# EAGLE board Qwiic-IMU-Panel (EAGLE 7.7.0), part 1 of 2
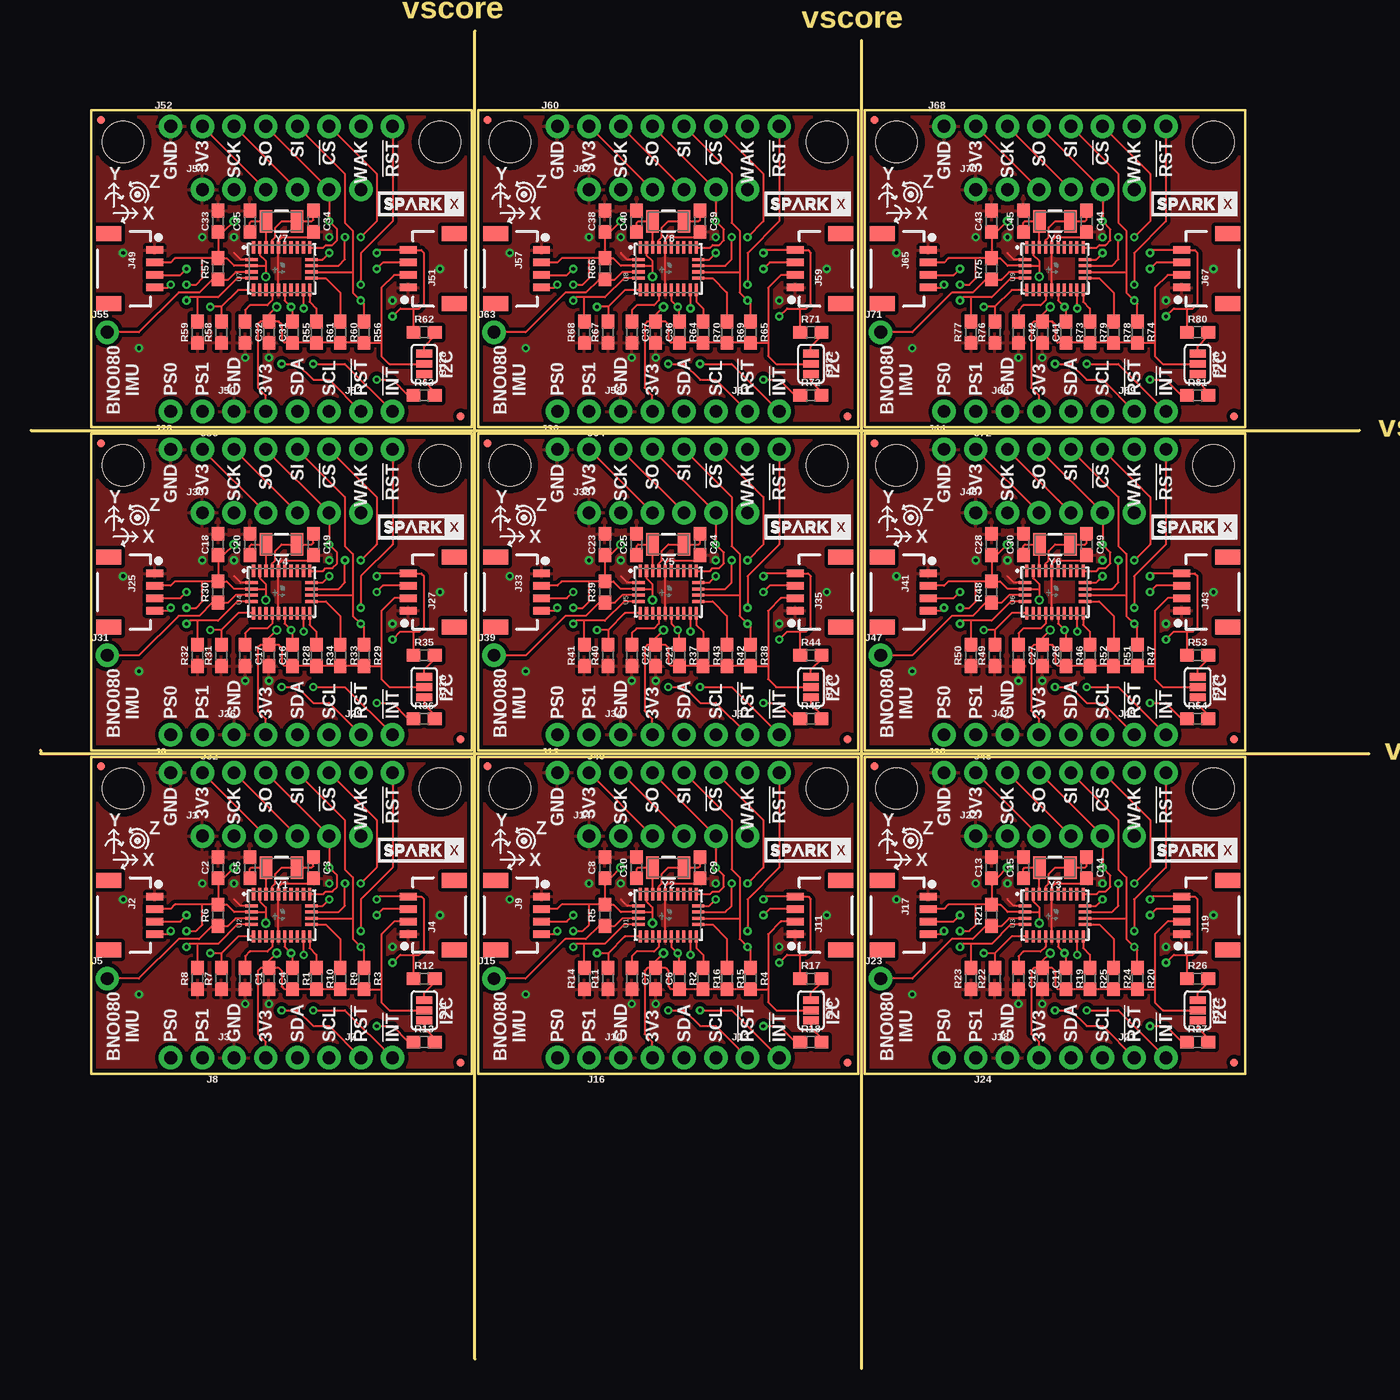
[diagram p0: board, top side]
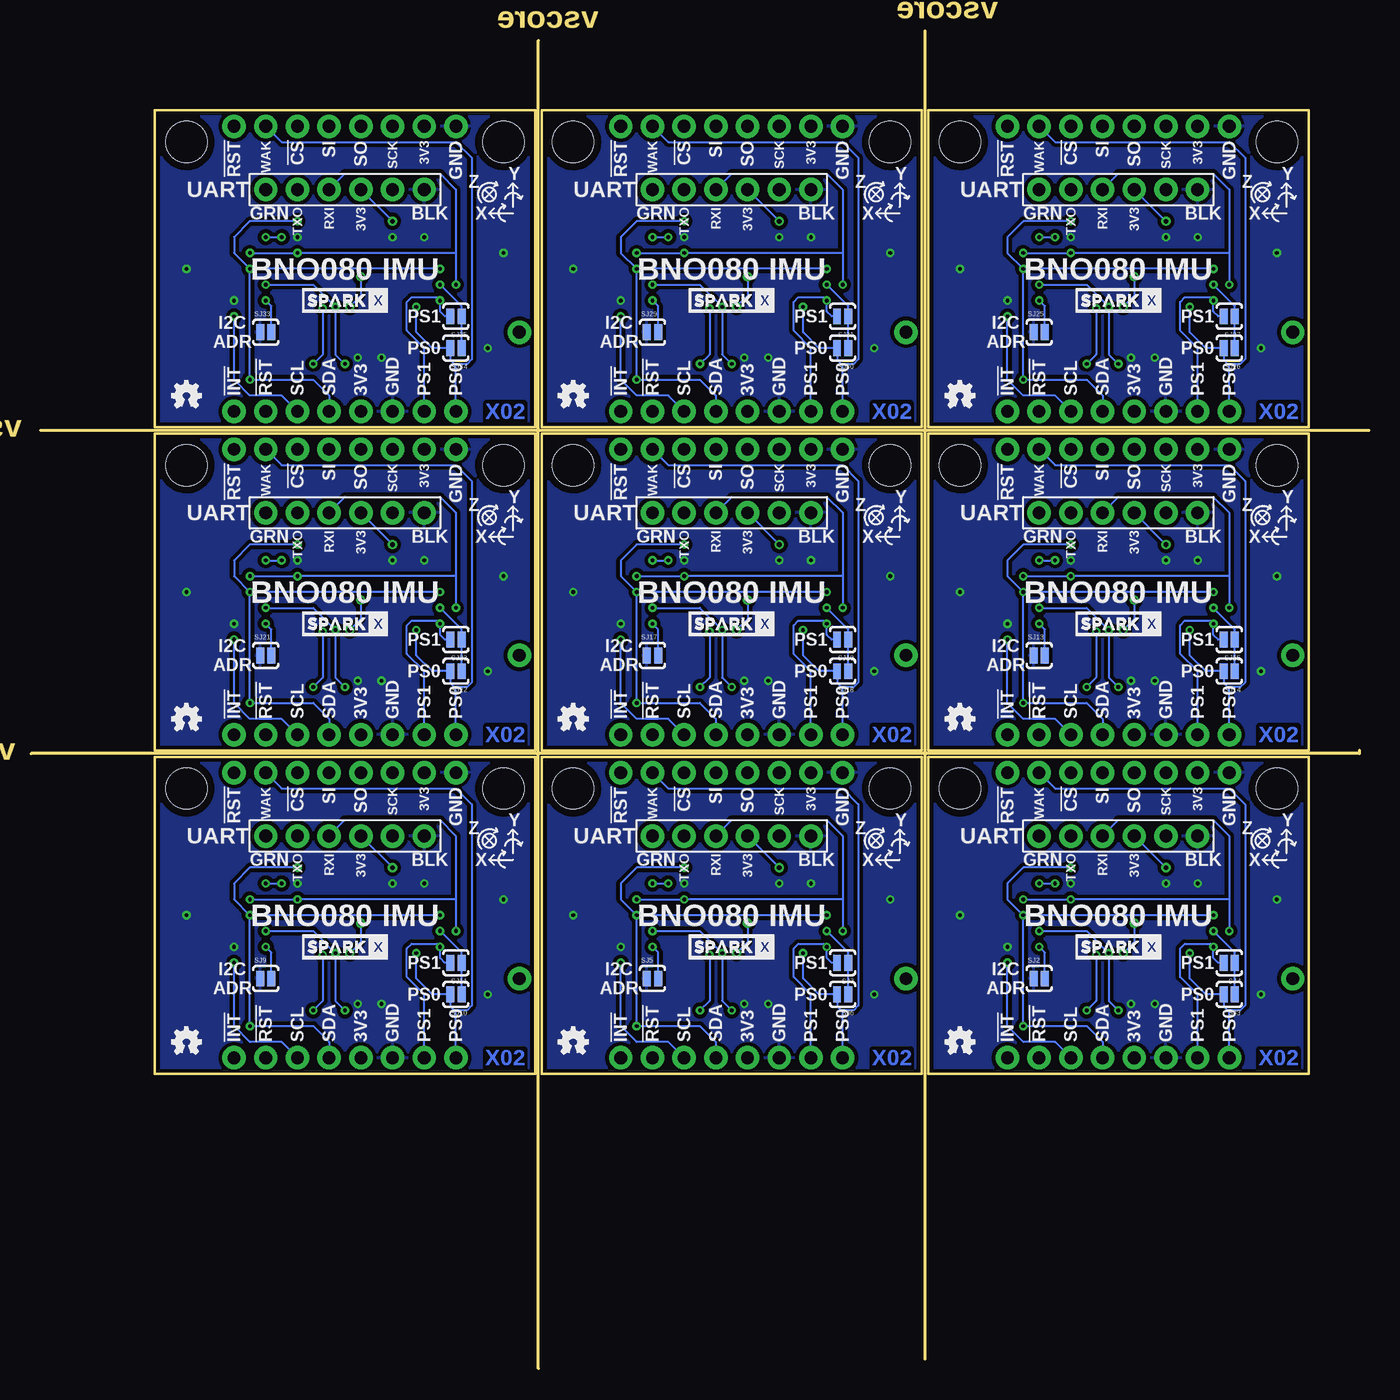
[diagram p1: board, bottom side, seen from below]

Size 107.19 x 107.19 mm. Coordinates in mm from the lower left corner, seen from the top.
Outline: 0.76,49.53 0.76,49.28 107.19,49.28
Outline: 0,75.18 106.43,75.18
Outline: 66.55,0 66.55,106.43
Outline: 35.56,0.76 35.56,107.19
Outline: 4.83,23.62 4.83,49.02 35.31,49.02 35.31,23.62 4.83,23.62
Outline: 35.81,23.62 35.81,49.02 66.29,49.02 66.29,23.62 35.81,23.62
Outline: 66.8,23.62 66.8,49.02 97.28,49.02 97.28,23.62 66.8,23.62
Outline: 4.83,49.53 4.83,74.93 35.31,74.93 35.31,49.53 4.83,49.53
Outline: 35.81,49.53 35.81,74.93 66.29,74.93 66.29,49.53 35.81,49.53
Outline: 66.8,49.53 66.8,74.93 97.28,74.93 97.28,49.53 66.8,49.53
Outline: 4.83,75.44 4.83,100.84 35.31,100.84 35.31,75.44 4.83,75.44
Outline: 35.81,75.44 35.81,100.84 66.29,100.84 66.29,75.44 35.81,75.44
Outline: 66.8,75.44 66.8,100.84 97.28,100.84 97.28,75.44 66.8,75.44
Copper layers (1*16): Top 0.035mm / dielectric 1.5mm / Bottom 0.035mm
Design rules "SparkFun-2-layer-PCBWay-LIMIT": minimum track width 6mil, minimum drill 12mil, track to track 6mil, track to pad 6mil, pad to pad 6mil, via to via 6mil, smd to smd 6mil, copper to edge 6mil, drill to drill 6mil, minimum pad ring 7mil, minimum via ring 7mil, stop-mask expansion 4mil, vias tented up to drill 25mil, thermal gap 10mil

## Footprints (pad centres in the part's own frame; a part is rotated, then mirrored left to right if it is on the bottom)
0603 = smd 1.1 x 1: 1 -0.85,0; 2 0.85,0
1X06_NO_SILK = drill 1.016 pad 1.88: 1 0,0; 2 2.54,0; 3 5.08,0; 4 7.62,0; 5 10.16,0; 6 12.7,0
1X04_1MM_RA = smd 0.6 x 1.35: 1 -1.5,0; 2 -0.5,0; 3 0.5,0; 4 1.5,0 | smd 1.2 x 2: NC1 2.8,-3.675; NC2 -2.8,-3.675
1X04_NO_SILK = drill 1.016 pad 1.88: 1 0,0; 2 2.54,0; 3 5.08,0; 4 7.62,0
1X01_NO_SILK = drill 1.016 pad 1.88: 1 0,0
1X08_NO_SILK = drill 1.016 pad 1.88: 1 0,0; 2 2.54,0; 3 5.08,0; 4 7.62,0; 5 10.16,0; 6 12.7,0; 7 15.24,0; 8 17.78,0
1X02_NO_SILK = drill 1.016 pad 1.88: 1 0,0; 2 2.54,0
STAND-OFF = hole 3.302: 0,0
MICRO-FIDUCIAL = smd 0.635 x 0.635: 1 0,0
SMT-JUMPER_3_2-NC_PASTE_SILK = smd 0.635 x 1.27: 1 -0.813,0; 2 0,0; 3 0.813,0
SJ_2S-NO = smd 0.635 x 1.27: 1 -0.45,0; 2 0.45,0
LGA-28 = smd 1 x 0.25: 1 1.7,2.25; 6 -1.7,2.25; 7 -1.7,1.75; 8 -1.7,1.25; 9 -1.7,0.75; 10 -1.7,0.25; 11 -1.7,-0.25; 12 -1.7,-0.75; 13 -1.7,-1.25; 14 -1.7,-1.75; 15 -1.7,-2.25; 20 1.7,-2.25; 21 1.7,-1.75; 22 1.7,-1.25; 23 1.7,-0.75; 24 1.7,-0.25; 25 1.7,0.25; 26 1.7,0.75; 27 1.7,1.25; 28 1.7,1.75 | smd 0.25 x 1: 2 0.75,2.4; 3 0.25,2.4; 4 -0.25,2.4; 5 -0.75,2.4; 16 -0.75,-2.4; 17 -0.25,-2.4; 18 0.25,-2.4; 19 0.75,-2.4
CRYSTAL-SMD-3.2X1.5MM = smd 1 x 1.8: P$1 -1.25,0; P$2 1.25,0

## Placement (x,y rotation side)
C1  0.1uF  [0603]  17.14,31.24 270 top
C2  0.1uF  [0603]  14.99,40.13 90 top
C3  22pF  [0603]  22.61,40.13 270 top
C4  0.1uF  [0603]  19.05,31.24 270 top
C5  22pF  [0603]  17.53,40.13 90 top
C6  0.1uF  [0603]  50.04,31.24 270 top
C7  0.1uF  [0603]  48.13,31.24 270 top
C8  0.1uF  [0603]  45.97,40.13 90 top
C9  22pF  [0603]  53.59,40.13 270 top
C10  22pF  [0603]  48.51,40.13 90 top
C11  0.1uF  [0603]  81.03,31.24 270 top
C12  0.1uF  [0603]  79.12,31.24 270 top
C13  0.1uF  [0603]  76.96,40.13 90 top
C14  22pF  [0603]  84.58,40.13 270 top
C15  22pF  [0603]  79.5,40.13 90 top
C16  0.1uF  [0603]  19.05,57.15 270 top
C17  0.1uF  [0603]  17.14,57.15 270 top
C18  0.1uF  [0603]  14.99,66.04 90 top
C19  22pF  [0603]  22.61,66.04 270 top
C20  22pF  [0603]  17.53,66.04 90 top
C21  0.1uF  [0603]  50.04,57.15 270 top
C22  0.1uF  [0603]  48.13,57.15 270 top
C23  0.1uF  [0603]  45.97,66.04 90 top
C24  22pF  [0603]  53.59,66.04 270 top
C25  22pF  [0603]  48.51,66.04 90 top
C26  0.1uF  [0603]  81.03,57.15 270 top
C27  0.1uF  [0603]  79.12,57.15 270 top
C28  0.1uF  [0603]  76.96,66.04 90 top
C29  22pF  [0603]  84.58,66.04 270 top
C30  22pF  [0603]  79.5,66.04 90 top
C31  0.1uF  [0603]  19.05,83.06 270 top
C32  0.1uF  [0603]  17.14,83.06 270 top
C33  0.1uF  [0603]  14.99,91.95 90 top
C34  22pF  [0603]  22.61,91.95 270 top
C35  22pF  [0603]  17.53,91.95 90 top
C36  0.1uF  [0603]  50.04,83.06 270 top
C37  0.1uF  [0603]  48.13,83.06 270 top
C38  0.1uF  [0603]  45.97,91.95 90 top
C39  22pF  [0603]  53.59,91.95 270 top
C40  22pF  [0603]  48.51,91.95 90 top
C41  0.1uF  [0603]  81.03,83.06 270 top
C42  0.1uF  [0603]  79.12,83.06 270 top
C43  0.1uF  [0603]  76.96,91.95 90 top
C44  22pF  [0603]  84.58,91.95 270 top
C45  22pF  [0603]  79.5,91.95 90 top
J1  [1X06_NO_SILK]  13.72,42.67 0 top
J2  SMD  [1X04_1MM_RA]  9.91,36.32 270 top
J3  PTH  [1X04_NO_SILK]  16.26,24.89 0 top
J4  SMD  [1X04_1MM_RA]  30.23,36.32 90 top
J5  [1X01_NO_SILK]  6.1,31.24 0 top
J6  SPI  [1X08_NO_SILK]  11.18,47.75 0 top
J7  [1X02_NO_SILK]  26.42,24.89 0 top
J8  [1X02_NO_SILK]  13.72,24.89 180 top
J9  SMD  [1X04_1MM_RA]  40.89,36.32 270 top
J10  PTH  [1X04_NO_SILK]  47.24,24.89 0 top
J11  SMD  [1X04_1MM_RA]  61.21,36.32 90 top
J12  SPI  [1X08_NO_SILK]  42.16,47.75 0 top
J13  [1X02_NO_SILK]  57.4,24.89 0 top
J14  [1X06_NO_SILK]  44.7,42.67 0 top
J15  [1X01_NO_SILK]  37.08,31.24 0 top
J16  [1X02_NO_SILK]  44.7,24.89 180 top
J17  SMD  [1X04_1MM_RA]  71.88,36.32 270 top
J18  PTH  [1X04_NO_SILK]  78.23,24.89 0 top
J19  SMD  [1X04_1MM_RA]  92.2,36.32 90 top
J20  SPI  [1X08_NO_SILK]  73.15,47.75 0 top
J21  [1X02_NO_SILK]  88.39,24.89 0 top
J22  [1X06_NO_SILK]  75.69,42.67 0 top
J23  [1X01_NO_SILK]  68.07,31.24 0 top
J24  [1X02_NO_SILK]  75.69,24.89 180 top
J25  SMD  [1X04_1MM_RA]  9.91,62.23 270 top
J26  PTH  [1X04_NO_SILK]  16.26,50.8 0 top
J27  SMD  [1X04_1MM_RA]  30.23,62.23 90 top
J28  SPI  [1X08_NO_SILK]  11.18,73.66 0 top
J29  [1X02_NO_SILK]  26.42,50.8 0 top
J30  [1X06_NO_SILK]  13.72,68.58 0 top
J31  [1X01_NO_SILK]  6.1,57.15 0 top
J32  [1X02_NO_SILK]  13.72,50.8 180 top
J33  SMD  [1X04_1MM_RA]  40.89,62.23 270 top
J34  PTH  [1X04_NO_SILK]  47.24,50.8 0 top
J35  SMD  [1X04_1MM_RA]  61.21,62.23 90 top
J36  SPI  [1X08_NO_SILK]  42.16,73.66 0 top
J37  [1X02_NO_SILK]  57.4,50.8 0 top
J38  [1X06_NO_SILK]  44.7,68.58 0 top
J39  [1X01_NO_SILK]  37.08,57.15 0 top
J40  [1X02_NO_SILK]  44.7,50.8 180 top
J41  SMD  [1X04_1MM_RA]  71.88,62.23 270 top
J42  PTH  [1X04_NO_SILK]  78.23,50.8 0 top
J43  SMD  [1X04_1MM_RA]  92.2,62.23 90 top
J44  SPI  [1X08_NO_SILK]  73.15,73.66 0 top
J45  [1X02_NO_SILK]  88.39,50.8 0 top
J46  [1X06_NO_SILK]  75.69,68.58 0 top
J47  [1X01_NO_SILK]  68.07,57.15 0 top
J48  [1X02_NO_SILK]  75.69,50.8 180 top
J49  SMD  [1X04_1MM_RA]  9.91,88.14 270 top
J50  PTH  [1X04_NO_SILK]  16.26,76.71 0 top
J51  SMD  [1X04_1MM_RA]  30.23,88.14 90 top
J52  SPI  [1X08_NO_SILK]  11.18,99.57 0 top
J53  [1X02_NO_SILK]  26.42,76.71 0 top
J54  [1X06_NO_SILK]  13.72,94.49 0 top
J55  [1X01_NO_SILK]  6.1,83.06 0 top
J56  [1X02_NO_SILK]  13.72,76.71 180 top
J57  SMD  [1X04_1MM_RA]  40.89,88.14 270 top
J58  PTH  [1X04_NO_SILK]  47.24,76.71 0 top
J59  SMD  [1X04_1MM_RA]  61.21,88.14 90 top
J60  SPI  [1X08_NO_SILK]  42.16,99.57 0 top
J61  [1X02_NO_SILK]  57.4,76.71 0 top
J62  [1X06_NO_SILK]  44.7,94.49 0 top
J63  [1X01_NO_SILK]  37.08,83.06 0 top
J64  [1X02_NO_SILK]  44.7,76.71 180 top
J65  SMD  [1X04_1MM_RA]  71.88,88.14 270 top
J66  PTH  [1X04_NO_SILK]  78.23,76.71 0 top
J67  SMD  [1X04_1MM_RA]  92.2,88.14 90 top
J68  SPI  [1X08_NO_SILK]  73.15,99.57 0 top
J69  [1X02_NO_SILK]  88.39,76.71 0 top
J70  [1X06_NO_SILK]  75.69,94.49 0 top
J71  [1X01_NO_SILK]  68.07,83.06 0 top
J72  [1X02_NO_SILK]  75.69,76.71 180 top
JP1  STAND-OFF  [STAND-OFF]  38.35,46.48 0 top
JP2  FIDUCIALUFIDUCIAL  [MICRO-FIDUCIAL]  34.42,24.51 0 top
JP3  STAND-OFF  [STAND-OFF]  7.37,46.48 0 top
JP4  STAND-OFF  [STAND-OFF]  32.77,46.48 0 top
JP5  STAND-OFF  [STAND-OFF]  63.75,46.48 0 top
JP6  FIDUCIALUFIDUCIAL  [MICRO-FIDUCIAL]  5.59,48.26 0 top
JP7  FIDUCIALUFIDUCIAL  [MICRO-FIDUCIAL]  65.41,24.51 0 top
JP8  FIDUCIALUFIDUCIAL  [MICRO-FIDUCIAL]  36.58,48.26 0 top
JP9  STAND-OFF  [STAND-OFF]  69.34,46.48 0 top
JP10  STAND-OFF  [STAND-OFF]  94.74,46.48 0 top
JP11  FIDUCIALUFIDUCIAL  [MICRO-FIDUCIAL]  96.39,24.51 0 top
JP12  FIDUCIALUFIDUCIAL  [MICRO-FIDUCIAL]  67.56,48.26 0 top
JP13  STAND-OFF  [STAND-OFF]  7.37,72.39 0 top
JP14  STAND-OFF  [STAND-OFF]  32.77,72.39 0 top
JP15  FIDUCIALUFIDUCIAL  [MICRO-FIDUCIAL]  34.42,50.42 0 top
JP16  FIDUCIALUFIDUCIAL  [MICRO-FIDUCIAL]  5.59,74.17 0 top
JP17  STAND-OFF  [STAND-OFF]  38.35,72.39 0 top
JP18  STAND-OFF  [STAND-OFF]  63.75,72.39 0 top
JP19  FIDUCIALUFIDUCIAL  [MICRO-FIDUCIAL]  65.41,50.42 0 top
JP20  FIDUCIALUFIDUCIAL  [MICRO-FIDUCIAL]  36.58,74.17 0 top
JP21  STAND-OFF  [STAND-OFF]  69.34,72.39 0 top
JP22  STAND-OFF  [STAND-OFF]  94.74,72.39 0 top
JP23  FIDUCIALUFIDUCIAL  [MICRO-FIDUCIAL]  96.39,50.42 0 top
JP24  FIDUCIALUFIDUCIAL  [MICRO-FIDUCIAL]  67.56,74.17 0 top
JP25  STAND-OFF  [STAND-OFF]  7.37,98.3 0 top
JP26  STAND-OFF  [STAND-OFF]  32.77,98.3 0 top
JP27  FIDUCIALUFIDUCIAL  [MICRO-FIDUCIAL]  34.42,76.33 0 top
JP28  FIDUCIALUFIDUCIAL  [MICRO-FIDUCIAL]  5.59,100.08 0 top
JP29  STAND-OFF  [STAND-OFF]  38.35,98.3 0 top
JP30  STAND-OFF  [STAND-OFF]  63.75,98.3 0 top
JP31  FIDUCIALUFIDUCIAL  [MICRO-FIDUCIAL]  65.41,76.33 0 top
JP32  FIDUCIALUFIDUCIAL  [MICRO-FIDUCIAL]  36.58,100.08 0 top
JP33  STAND-OFF  [STAND-OFF]  69.34,98.3 0 top
JP34  STAND-OFF  [STAND-OFF]  94.74,98.3 0 top
JP35  FIDUCIALUFIDUCIAL  [MICRO-FIDUCIAL]  96.39,76.33 0 top
JP36  FIDUCIALUFIDUCIAL  [MICRO-FIDUCIAL]  67.56,100.08 0 top
LOGO1  OSHW-LOGOMINI  [OSHW-LOGO-MINI]  32.77,26.16 0 bottom
LOGO2  OSHW-LOGOMINI  [OSHW-LOGO-MINI]  63.75,26.16 0 bottom
LOGO3  OSHW-LOGOMINI  [OSHW-LOGO-MINI]  94.74,26.16 0 bottom
LOGO4  OSHW-LOGOMINI  [OSHW-LOGO-MINI]  32.77,52.07 0 bottom
LOGO5  OSHW-LOGOMINI  [OSHW-LOGO-MINI]  63.75,52.07 0 bottom
LOGO6  OSHW-LOGOMINI  [OSHW-LOGO-MINI]  94.74,52.07 0 bottom
LOGO7  OSHW-LOGOMINI  [OSHW-LOGO-MINI]  32.77,77.98 0 bottom
LOGO8  OSHW-LOGOMINI  [OSHW-LOGO-MINI]  63.75,77.98 0 bottom
LOGO9  OSHW-LOGOMINI  [OSHW-LOGO-MINI]  94.74,77.98 0 bottom
R1  10k  [0603]  20.96,31.24 270 top
R2  10k  [0603]  51.94,31.24 270 top
R3  10k  [0603]  26.67,31.24 270 top
R4  10k  [0603]  57.66,31.24 270 top
R5  10k  [0603]  45.97,36.32 90 top
R6  10k  [0603]  14.99,36.32 90 top
R7  10k  [0603]  15.24,31.24 90 top
R8  10k  [0603]  13.34,31.24 90 top
R9  4.7k  [0603]  24.77,31.24 270 top
R10  4.7k  [0603]  22.86,31.24 270 top
R11  10k  [0603]  46.23,31.24 90 top
R12  2.2k  [0603]  31.5,31.24 0 top
R13  2.2k  [0603]  31.5,26.16 0 top
R14  10k  [0603]  44.32,31.24 90 top
R15  4.7k  [0603]  55.75,31.24 270 top
R16  4.7k  [0603]  53.85,31.24 270 top
R17  2.2k  [0603]  62.48,31.24 0 top
R18  2.2k  [0603]  62.48,26.16 0 top
R19  10k  [0603]  82.93,31.24 270 top
R20  10k  [0603]  88.65,31.24 270 top
R21  10k  [0603]  76.96,36.32 90 top
R22  10k  [0603]  77.22,31.24 90 top
R23  10k  [0603]  75.31,31.24 90 top
R24  4.7k  [0603]  86.74,31.24 270 top
R25  4.7k  [0603]  84.84,31.24 270 top
R26  2.2k  [0603]  93.47,31.24 0 top
R27  2.2k  [0603]  93.47,26.16 0 top
R28  10k  [0603]  20.96,57.15 270 top
R29  10k  [0603]  26.67,57.15 270 top
R30  10k  [0603]  14.99,62.23 90 top
R31  10k  [0603]  15.24,57.15 90 top
R32  10k  [0603]  13.34,57.15 90 top
R33  4.7k  [0603]  24.77,57.15 270 top
R34  4.7k  [0603]  22.86,57.15 270 top
R35  2.2k  [0603]  31.5,57.15 0 top
R36  2.2k  [0603]  31.5,52.07 0 top
R37  10k  [0603]  51.94,57.15 270 top
R38  10k  [0603]  57.66,57.15 270 top
R39  10k  [0603]  45.97,62.23 90 top
R40  10k  [0603]  46.23,57.15 90 top
R41  10k  [0603]  44.32,57.15 90 top
R42  4.7k  [0603]  55.75,57.15 270 top
R43  4.7k  [0603]  53.85,57.15 270 top
R44  2.2k  [0603]  62.48,57.15 0 top
R45  2.2k  [0603]  62.48,52.07 0 top
R46  10k  [0603]  82.93,57.15 270 top
R47  10k  [0603]  88.65,57.15 270 top
R48  10k  [0603]  76.96,62.23 90 top
R49  10k  [0603]  77.22,57.15 90 top
R50  10k  [0603]  75.31,57.15 90 top
R51  4.7k  [0603]  86.74,57.15 270 top
R52  4.7k  [0603]  84.84,57.15 270 top
R53  2.2k  [0603]  93.47,57.15 0 top
R54  2.2k  [0603]  93.47,52.07 0 top
R55  10k  [0603]  20.96,83.06 270 top
R56  10k  [0603]  26.67,83.06 270 top
R57  10k  [0603]  14.99,88.14 90 top
R58  10k  [0603]  15.24,83.06 90 top
R59  10k  [0603]  13.34,83.06 90 top
R60  4.7k  [0603]  24.77,83.06 270 top
R61  4.7k  [0603]  22.86,83.06 270 top
R62  2.2k  [0603]  31.5,83.06 0 top
R63  2.2k  [0603]  31.5,77.98 0 top
R64  10k  [0603]  51.94,83.06 270 top
R65  10k  [0603]  57.66,83.06 270 top
R66  10k  [0603]  45.97,88.14 90 top
R67  10k  [0603]  46.23,83.06 90 top
R68  10k  [0603]  44.32,83.06 90 top
R69  4.7k  [0603]  55.75,83.06 270 top
R70  4.7k  [0603]  53.85,83.06 270 top
R71  2.2k  [0603]  62.48,83.06 0 top
R72  2.2k  [0603]  62.48,77.98 0 top
R73  10k  [0603]  82.93,83.06 270 top
R74  10k  [0603]  88.65,83.06 270 top
R75  10k  [0603]  76.96,88.14 90 top
R76  10k  [0603]  77.22,83.06 90 top
R77  10k  [0603]  75.31,83.06 90 top
R78  4.7k  [0603]  86.74,83.06 270 top
R79  4.7k  [0603]  84.84,83.06 270 top
R80  2.2k  [0603]  93.47,83.06 0 top
R81  2.2k  [0603]  93.47,77.98 0 top
SJ1  [SMT-JUMPER_3_2-NC_PASTE_SILK]  31.5,28.7 270 top
SJ2  [SJ_2S-NO]  26.42,31.24 0 bottom
SJ3  [SJ_2S-NO]  11.18,29.97 180 bottom
SJ4  [SJ_2S-NO]  11.18,32.51 180 bottom
SJ5  [SJ_2S-NO]  57.4,31.24 0 bottom
SJ6  [SJ_2S-NO]  42.16,29.97 180 bottom
SJ7  [SJ_2S-NO]  42.16,32.51 180 bottom
SJ8  [SMT-JUMPER_3_2-NC_PASTE_SILK]  62.48,28.7 270 top
SJ9  [SJ_2S-NO]  88.39,31.24 0 bottom
SJ10  [SJ_2S-NO]  73.15,29.97 180 bottom
SJ11  [SJ_2S-NO]  73.15,32.51 180 bottom
SJ12  [SMT-JUMPER_3_2-NC_PASTE_SILK]  93.47,28.7 270 top
SJ13  [SJ_2S-NO]  26.42,57.15 0 bottom
SJ14  [SJ_2S-NO]  11.18,55.88 180 bottom
SJ15  [SJ_2S-NO]  11.18,58.42 180 bottom
SJ16  [SMT-JUMPER_3_2-NC_PASTE_SILK]  31.5,54.61 270 top
SJ17  [SJ_2S-NO]  57.4,57.15 0 bottom
SJ18  [SJ_2S-NO]  42.16,55.88 180 bottom
SJ19  [SJ_2S-NO]  42.16,58.42 180 bottom
SJ20  [SMT-JUMPER_3_2-NC_PASTE_SILK]  62.48,54.61 270 top
SJ21  [SJ_2S-NO]  88.39,57.15 0 bottom
SJ22  [SJ_2S-NO]  73.15,55.88 180 bottom
SJ23  [SJ_2S-NO]  73.15,58.42 180 bottom
SJ24  [SMT-JUMPER_3_2-NC_PASTE_SILK]  93.47,54.61 270 top
SJ25  [SJ_2S-NO]  26.42,83.06 0 bottom
SJ26  [SJ_2S-NO]  11.18,81.79 180 bottom
SJ27  [SJ_2S-NO]  11.18,84.33 180 bottom
SJ28  [SMT-JUMPER_3_2-NC_PASTE_SILK]  31.5,80.52 270 top
SJ29  [SJ_2S-NO]  57.4,83.06 0 bottom
SJ30  [SJ_2S-NO]  42.16,81.79 180 bottom
SJ31  [SJ_2S-NO]  42.16,84.33 180 bottom
SJ32  [SMT-JUMPER_3_2-NC_PASTE_SILK]  62.48,80.52 270 top
SJ33  [SJ_2S-NO]  88.39,83.06 0 bottom
SJ34  [SJ_2S-NO]  73.15,81.79 180 bottom
SJ35  [SJ_2S-NO]  73.15,84.33 180 bottom
SJ36  [SMT-JUMPER_3_2-NC_PASTE_SILK]  93.47,80.52 270 top
U1  BNO080  [LGA-28]  51.05,36.32 90 top
U2  BNO080  [LGA-28]  20.07,36.32 90 top
U3  BNO080  [LGA-28]  82.04,36.32 90 top
U4  BNO080  [LGA-28]  20.07,62.23 90 top
U5  BNO080  [LGA-28]  51.05,62.23 90 top
U6  BNO080  [LGA-28]  82.04,62.23 90 top
U7  BNO080  [LGA-28]  20.07,88.14 90 top
U8  BNO080  [LGA-28]  51.05,88.14 90 top
U9  BNO080  [LGA-28]  82.04,88.14 90 top
U$1  SPARKX-LOGO3  [SPARKX-SMALL]  20.07,33.78 0 bottom
U$2  SPARKX-LOGO3  [SPARKX-SMALL]  31.24,41.53 0 top
U$3  SPARKX-LOGO3  [SPARKX-SMALL]  62.23,41.53 0 top
U$4  SPARKX-LOGO3  [SPARKX-SMALL]  51.05,33.78 0 bottom
U$5  SPARKX-LOGO3  [SPARKX-SMALL]  93.22,41.53 0 top
U$6  SPARKX-LOGO3  [SPARKX-SMALL]  82.04,33.78 0 bottom
U$7  SPARKX-LOGO3  [SPARKX-SMALL]  31.24,67.44 0 top
U$8  SPARKX-LOGO3  [SPARKX-SMALL]  20.07,59.69 0 bottom
U$9  SPARKX-LOGO3  [SPARKX-SMALL]  62.23,67.44 0 top
U$10  SPARKX-LOGO3  [SPARKX-SMALL]  51.05,59.69 0 bottom
U$11  SPARKX-LOGO3  [SPARKX-SMALL]  93.22,67.44 0 top
U$12  SPARKX-LOGO3  [SPARKX-SMALL]  82.04,59.69 0 bottom
U$13  SPARKX-LOGO3  [SPARKX-SMALL]  31.24,93.34 0 top
U$14  SPARKX-LOGO3  [SPARKX-SMALL]  20.07,85.6 0 bottom
U$15  SPARKX-LOGO3  [SPARKX-SMALL]  62.23,93.34 0 top
U$16  SPARKX-LOGO3  [SPARKX-SMALL]  51.05,85.6 0 bottom
U$17  SPARKX-LOGO3  [SPARKX-SMALL]  93.22,93.34 0 top
U$18  SPARKX-LOGO3  [SPARKX-SMALL]  82.04,85.6 0 bottom
Y1  32.768kHz  [CRYSTAL-SMD-3.2X1.5MM]  20.07,40.13 180 top
Y2  32.768kHz  [CRYSTAL-SMD-3.2X1.5MM]  51.05,40.13 180 top
Y3  32.768kHz  [CRYSTAL-SMD-3.2X1.5MM]  82.04,40.13 180 top
Y4  32.768kHz  [CRYSTAL-SMD-3.2X1.5MM]  20.07,66.04 180 top
Y5  32.768kHz  [CRYSTAL-SMD-3.2X1.5MM]  51.05,66.04 180 top
Y6  32.768kHz  [CRYSTAL-SMD-3.2X1.5MM]  82.04,66.04 180 top
Y7  32.768kHz  [CRYSTAL-SMD-3.2X1.5MM]  20.07,91.95 180 top
Y8  32.768kHz  [CRYSTAL-SMD-3.2X1.5MM]  51.05,91.95 180 top
Y9  32.768kHz  [CRYSTAL-SMD-3.2X1.5MM]  82.04,91.95 180 top

## Library data of the parts
C1 C2 C4 C6-C8 C11-C13 C16-C18 C21-C23 C26-C28 C31-C33 C36-C38 C41-C43 = SparkFun-Capacitors; PROD_ID: CAP-00810
C3 C5 C9 C10 C14 C15 C19 C20 C24 C25 C29 C30 C34 C35 C39 C40 C44 C45 = SparkFun-Capacitors; PROD_ID: CAP-07876
J1 J14 J22 J30 J38 J46 J54 J62 J70 = SparkFun-Connectors; PROD_ID: CONN-08437
J2-J4 J9-J11 J17-J19 J25-J27 J33-J35 J41-J43 J49-J51 J57-J59 J65-J67 U$1-U$18 = SparkX
J5 J7 J8 J13 J15 J16 J21 J23 J24 J29 J31 J32 J37 J39 J40 J45 J47 J48 J53 J55 J56 J61 J63 J64 J69 J71 J72 = SparkFun-Connectors
J6 J12 J20 J28 J36 J44 J52 J60 J68 = SparkFun-Connectors; PROD_ID: CONN-08438
JP1-JP36 SJ2-SJ7 SJ9-SJ11 SJ13-SJ15 SJ17-SJ19 SJ21-SJ23 SJ25-SJ27 SJ29-SJ31 SJ33-SJ35 = SparkFun
LOGO1-LOGO9 = SparkFun-Aesthetics
R1-R8 R11 R14 R19-R23 R28-R32 R37-R41 R46-R50 R55-R59 R64-R68 R73-R77 = SparkFun-Resistors; PROD_ID: RES-00824
R9 R10 R15 R16 R24 R25 R33 R34 R42 R43 R51 R52 R60 R61 R69 R70 R78 R79 = SparkFun-Resistors; PROD_ID: RES-07857
R12 R13 R17 R18 R26 R27 R35 R36 R44 R45 R53 R54 R62 R63 R71 R72 R80 R81 = SparkFun-Resistors; PROD_ID: RES-08272
SJ1 SJ8 SJ12 SJ16 SJ20 SJ24 SJ28 SJ32 SJ36 = SparkFun-Jumpers
U1-U9 = BNO080
Y1-Y9 = SparkFun-Clocks; PROD_ID: XTAL-13062

## Nets
3.3V: C2.1 C4.1 J1.3 J2.2 J3.2 J4.2 J6.2 R1.2 R3.2 R6.2 R9.2 R10.2 SJ1.2 SJ3.1 SJ4.1 U2.3 U2.28
3.3V1: C6.1 C8.1 J9.2 J10.2 J11.2 J12.2 J14.3 R2.2 R4.2 R5.2 R15.2 R16.2 SJ6.1 SJ7.1 SJ8.2 U1.3 U1.28
3.3V2: C11.1 C13.1 J17.2 J18.2 J19.2 J20.2 J22.3 R19.2 R20.2 R21.2 R24.2 R25.2 SJ10.1 SJ11.1 SJ12.2 U3.3 U3.28
3.3V3: C16.1 C18.1 J25.2 J26.2 J27.2 J28.2 J30.3 R28.2 R29.2 R30.2 R33.2 R34.2 SJ14.1 SJ15.1 SJ16.2 U4.3 U4.28
3.3V4: C21.1 C23.1 J33.2 J34.2 J35.2 J36.2 J38.3 R37.2 R38.2 R39.2 R42.2 R43.2 SJ18.1 SJ19.1 SJ20.2 U5.3 U5.28
3.3V5: C26.1 C28.1 J41.2 J42.2 J43.2 J44.2 J46.3 R46.2 R47.2 R48.2 R51.2 R52.2 SJ22.1 SJ23.1 SJ24.2 U6.3 U6.28
3.3V6: C31.1 C33.1 J49.2 J50.2 J51.2 J52.2 J54.3 R55.2 R56.2 R57.2 R60.2 R61.2 SJ26.1 SJ27.1 SJ28.2 U7.3 U7.28
3.3V7: C36.1 C38.1 J57.2 J58.2 J59.2 J60.2 J62.3 R64.2 R65.2 R66.2 R69.2 R70.2 SJ30.1 SJ31.1 SJ32.2 U8.3 U8.28
3.3V8: C41.1 C43.1 J65.2 J66.2 J67.2 J68.2 J70.3 R73.2 R74.2 R75.2 R78.2 R79.2 SJ34.1 SJ35.1 SJ36.2 U9.3 U9.28
!BOOT: J5.1 R6.1 U2.4
!BOOT1: J15.1 R5.1 U1.4
!BOOT2: J23.1 R21.1 U3.4
!BOOT3: J31.1 R30.1 U4.4
!BOOT4: J39.1 R39.1 U5.4
!BOOT5: J47.1 R48.1 U6.4
!BOOT6: J55.1 R57.1 U7.4
!BOOT7: J63.1 R66.1 U8.4
!BOOT8: J71.1 R75.1 U9.4
!CS: J6.6 U2.18
!CS1: J12.6 U1.18
!CS2: J20.6 U3.18
!CS3: J28.6 U4.18
!CS4: J36.6 U5.18
!CS5: J44.6 U6.18
!CS6: J52.6 U7.18
!CS7: J60.6 U8.18
!CS8: J68.6 U9.18
!INT: J7.2 U2.14
!INT1: J13.2 U1.14
!INT2: J21.2 U3.14
!INT3: J29.2 U4.14
!INT4: J37.2 U5.14
!INT5: J45.2 U6.14
!INT6: J53.2 U7.14
!INT7: J61.2 U8.14
!INT8: J69.2 U9.14
!RST: J6.8 J7.1 R1.1 U2.11
!RST1: J12.8 J13.1 R2.1 U1.11
!RST2: J20.8 J21.1 R19.1 U3.11
!RST3: J28.8 J29.1 R28.1 U4.11
!RST4: J36.8 J37.1 R37.1 U5.11
!RST5: J44.8 J45.1 R46.1 U6.11
!RST6: J52.8 J53.1 R55.1 U7.11
!RST7: J60.8 J61.1 R64.1 U8.11
!RST8: J68.8 J69.1 R73.1 U9.11
ADR/MOSI: J6.5 R3.1 SJ2.2 U2.17
ADR/MOSI1: J12.5 R4.1 SJ5.2 U1.17
ADR/MOSI2: J20.5 R20.1 SJ9.2 U3.17
ADR/MOSI3: J28.5 R29.1 SJ13.2 U4.17
ADR/MOSI4: J36.5 R38.1 SJ17.2 U5.17
ADR/MOSI5: J44.5 R47.1 SJ21.2 U6.17
ADR/MOSI6: J52.5 R56.1 SJ25.2 U7.17
ADR/MOSI7: J60.5 R65.1 SJ29.2 U8.17
ADR/MOSI8: J68.5 R74.1 SJ33.2 U9.17
CAP: C1.1 U2.9
CAP1: C7.1 U1.9
CAP2: C12.1 U3.9
CAP3: C17.1 U4.9
CAP4: C22.1 U5.9
CAP5: C27.1 U6.9
CAP6: C32.1 U7.9
CAP7: C37.1 U8.9
CAP8: C42.1 U9.9
GND: C1.2 C2.2 C3.2 C4.2 C5.2 J1.1 J2.1 J3.1 J4.1 J6.1 R7.1 R8.1 SJ2.1 U2.2 U2.10 U2.25
GND1: C6.2 C7.2 C8.2 C9.2 C10.2 J9.1 J10.1 J11.1 J12.1 J14.1 R11.1 R14.1 SJ5.1 U1.2 U1.10 U1.25
GND2: C11.2 C12.2 C13.2 C14.2 C15.2 J17.1 J18.1 J19.1 J20.1 J22.1 R22.1 R23.1 SJ9.1 U3.2 U3.10 U3.25
GND3: C16.2 C17.2 C18.2 C19.2 C20.2 J25.1 J26.1 J27.1 J28.1 J30.1 R31.1 R32.1 SJ13.1 U4.2 U4.10 U4.25
GND4: C21.2 C22.2 C23.2 C24.2 C25.2 J33.1 J34.1 J35.1 J36.1 J38.1 R40.1 R41.1 SJ17.1 U5.2 U5.10 U5.25
GND5: C26.2 C27.2 C28.2 C29.2 C30.2 J41.1 J42.1 J43.1 J44.1 J46.1 R49.1 R50.1 SJ21.1 U6.2 U6.10 U6.25
GND6: C31.2 C32.2 C33.2 C34.2 C35.2 J49.1 J50.1 J51.1 J52.1 J54.1 R58.1 R59.1 SJ25.1 U7.2 U7.10 U7.25
GND7: C36.2 C37.2 C38.2 C39.2 C40.2 J57.1 J58.1 J59.1 J60.1 J62.1 R67.1 R68.1 SJ29.1 U8.2 U8.10 U8.25
GND8: C41.2 C42.2 C43.2 C44.2 C45.2 J65.1 J66.1 J67.1 J68.1 J70.1 R76.1 R77.1 SJ33.1 U9.2 U9.10 U9.25
N$1: C5.1 U2.27 Y1.P$2
N$2: C3.1 U2.26 Y1.P$1
N$3: C10.1 U1.27 Y2.P$2
N$4: C9.1 U1.26 Y2.P$1
N$5: C15.1 U3.27 Y3.P$2
N$6: C14.1 U3.26 Y3.P$1
N$7: C20.1 U4.27 Y4.P$2
N$8: C19.1 U4.26 Y4.P$1
N$9: C25.1 U5.27 Y5.P$2
N$10: C24.1 U5.26 Y5.P$1
N$11: C30.1 U6.27 Y6.P$2
N$12: C29.1 U6.26 Y6.P$1
N$13: C35.1 U7.27 Y7.P$2
N$14: C34.1 U7.26 Y7.P$1
N$15: C40.1 U8.27 Y8.P$2
N$16: C39.1 U8.26 Y8.P$1
N$17: C45.1 U9.27 Y9.P$2
N$18: C44.1 U9.26 Y9.P$1
PS0/WAKE: J6.7 J8.2 R7.2 SJ3.2 U2.6
PS0/WAKE1: J12.7 J16.2 R11.2 SJ6.2 U1.6
PS0/WAKE2: J20.7 J24.2 R22.2 SJ10.2 U3.6
PS0/WAKE3: J28.7 J32.2 R31.2 SJ14.2 U4.6
PS0/WAKE4: J36.7 J40.2 R40.2 SJ18.2 U5.6
PS0/WAKE5: J44.7 J48.2 R49.2 SJ22.2 U6.6
PS0/WAKE6: J52.7 J56.2 R58.2 SJ26.2 U7.6
PS0/WAKE7: J60.7 J64.2 R67.2 SJ30.2 U8.6
PS0/WAKE8: J68.7 J72.2 R76.2 SJ34.2 U9.6
PS1: J8.1 R8.2 SJ4.2 U2.5
PS2: J16.1 R14.2 SJ7.2 U1.5
PS3: J24.1 R23.2 SJ11.2 U3.5
PS4: J32.1 R32.2 SJ15.2 U4.5
PS5: J40.1 R41.2 SJ19.2 U5.5
PS6: J48.1 R50.2 SJ23.2 U6.5
PS7: J56.1 R59.2 SJ27.2 U7.5
PS8: J64.1 R68.2 SJ31.2 U8.5
PS9: J72.1 R77.2 SJ35.2 U9.5
S_SCL: R10.1 U2.15
S_SCL1: R16.1 U1.15
S_SCL2: R25.1 U3.15
S_SCL3: R34.1 U4.15
S_SCL4: R43.1 U5.15
S_SCL5: R52.1 U6.15
S_SCL6: R61.1 U7.15
S_SCL7: R70.1 U8.15
S_SCL8: R79.1 U9.15
S_SDA: R9.1 U2.16
S_SDA1: R15.1 U1.16
S_SDA2: R24.1 U3.16
S_SDA3: R33.1 U4.16
S_SDA4: R42.1 U5.16
S_SDA5: R51.1 U6.16
S_SDA6: R60.1 U7.16
S_SDA7: R69.1 U8.16
S_SDA8: R78.1 U9.16
SCL/SCK/RX: J1.4 J2.4 J3.4 J4.4 J6.3 R12.1 U2.19
SCL/SCK/RX1: J9.4 J10.4 J11.4 J12.3 J14.4 R17.1 U1.19
SCL/SCK/RX2: J17.4 J18.4 J19.4 J20.3 J22.4 R26.1 U3.19
SCL/SCK/RX3: J25.4 J26.4 J27.4 J28.3 J30.4 R35.1 U4.19
SCL/SCK/RX4: J33.4 J34.4 J35.4 J36.3 J38.4 R44.1 U5.19
SCL/SCK/RX5: J41.4 J42.4 J43.4 J44.3 J46.4 R53.1 U6.19
SCL/SCK/RX6: J49.4 J50.4 J51.4 J52.3 J54.4 R62.1 U7.19
SCL/SCK/RX7: J57.4 J58.4 J59.4 J60.3 J62.4 R71.1 U8.19
SCL/SCK/RX8: J65.4 J66.4 J67.4 J68.3 J70.4 R80.1 U9.19
SCL_PU: R12.2 SJ1.1
SCL_PU1: R17.2 SJ8.1
SCL_PU2: R26.2 SJ12.1
SCL_PU3: R35.2 SJ16.1
SCL_PU4: R44.2 SJ20.1
SCL_PU5: R53.2 SJ24.1
SCL_PU6: R62.2 SJ28.1
SCL_PU7: R71.2 SJ32.1
SCL_PU8: R80.2 SJ36.1
SDA/MISO/TX: J1.5 J2.3 J3.3 J4.3 J6.4 R13.1 U2.20
SDA/MISO/TX1: J9.3 J10.3 J11.3 J12.4 J14.5 R18.1 U1.20
SDA/MISO/TX2: J17.3 J18.3 J19.3 J20.4 J22.5 R27.1 U3.20
SDA/MISO/TX3: J25.3 J26.3 J27.3 J28.4 J30.5 R36.1 U4.20
SDA/MISO/TX4: J33.3 J34.3 J35.3 J36.4 J38.5 R45.1 U5.20
SDA/MISO/TX5: J41.3 J42.3 J43.3 J44.4 J46.5 R54.1 U6.20
SDA/MISO/TX6: J49.3 J50.3 J51.3 J52.4 J54.5 R63.1 U7.20
SDA/MISO/TX7: J57.3 J58.3 J59.3 J60.4 J62.5 R72.1 U8.20
SDA/MISO/TX8: J65.3 J66.3 J67.3 J68.4 J70.5 R81.1 U9.20
SDA_PU: R13.2 SJ1.3
SDA_PU1: R18.2 SJ8.3
SDA_PU2: R27.2 SJ12.3
SDA_PU3: R36.2 SJ16.3
SDA_PU4: R45.2 SJ20.3
SDA_PU5: R54.2 SJ24.3
SDA_PU6: R63.2 SJ28.3
SDA_PU7: R72.2 SJ32.3
SDA_PU8: R81.2 SJ36.3